# EAGLE board NEMOTIC HORSE (EAGLE 9.6.2)
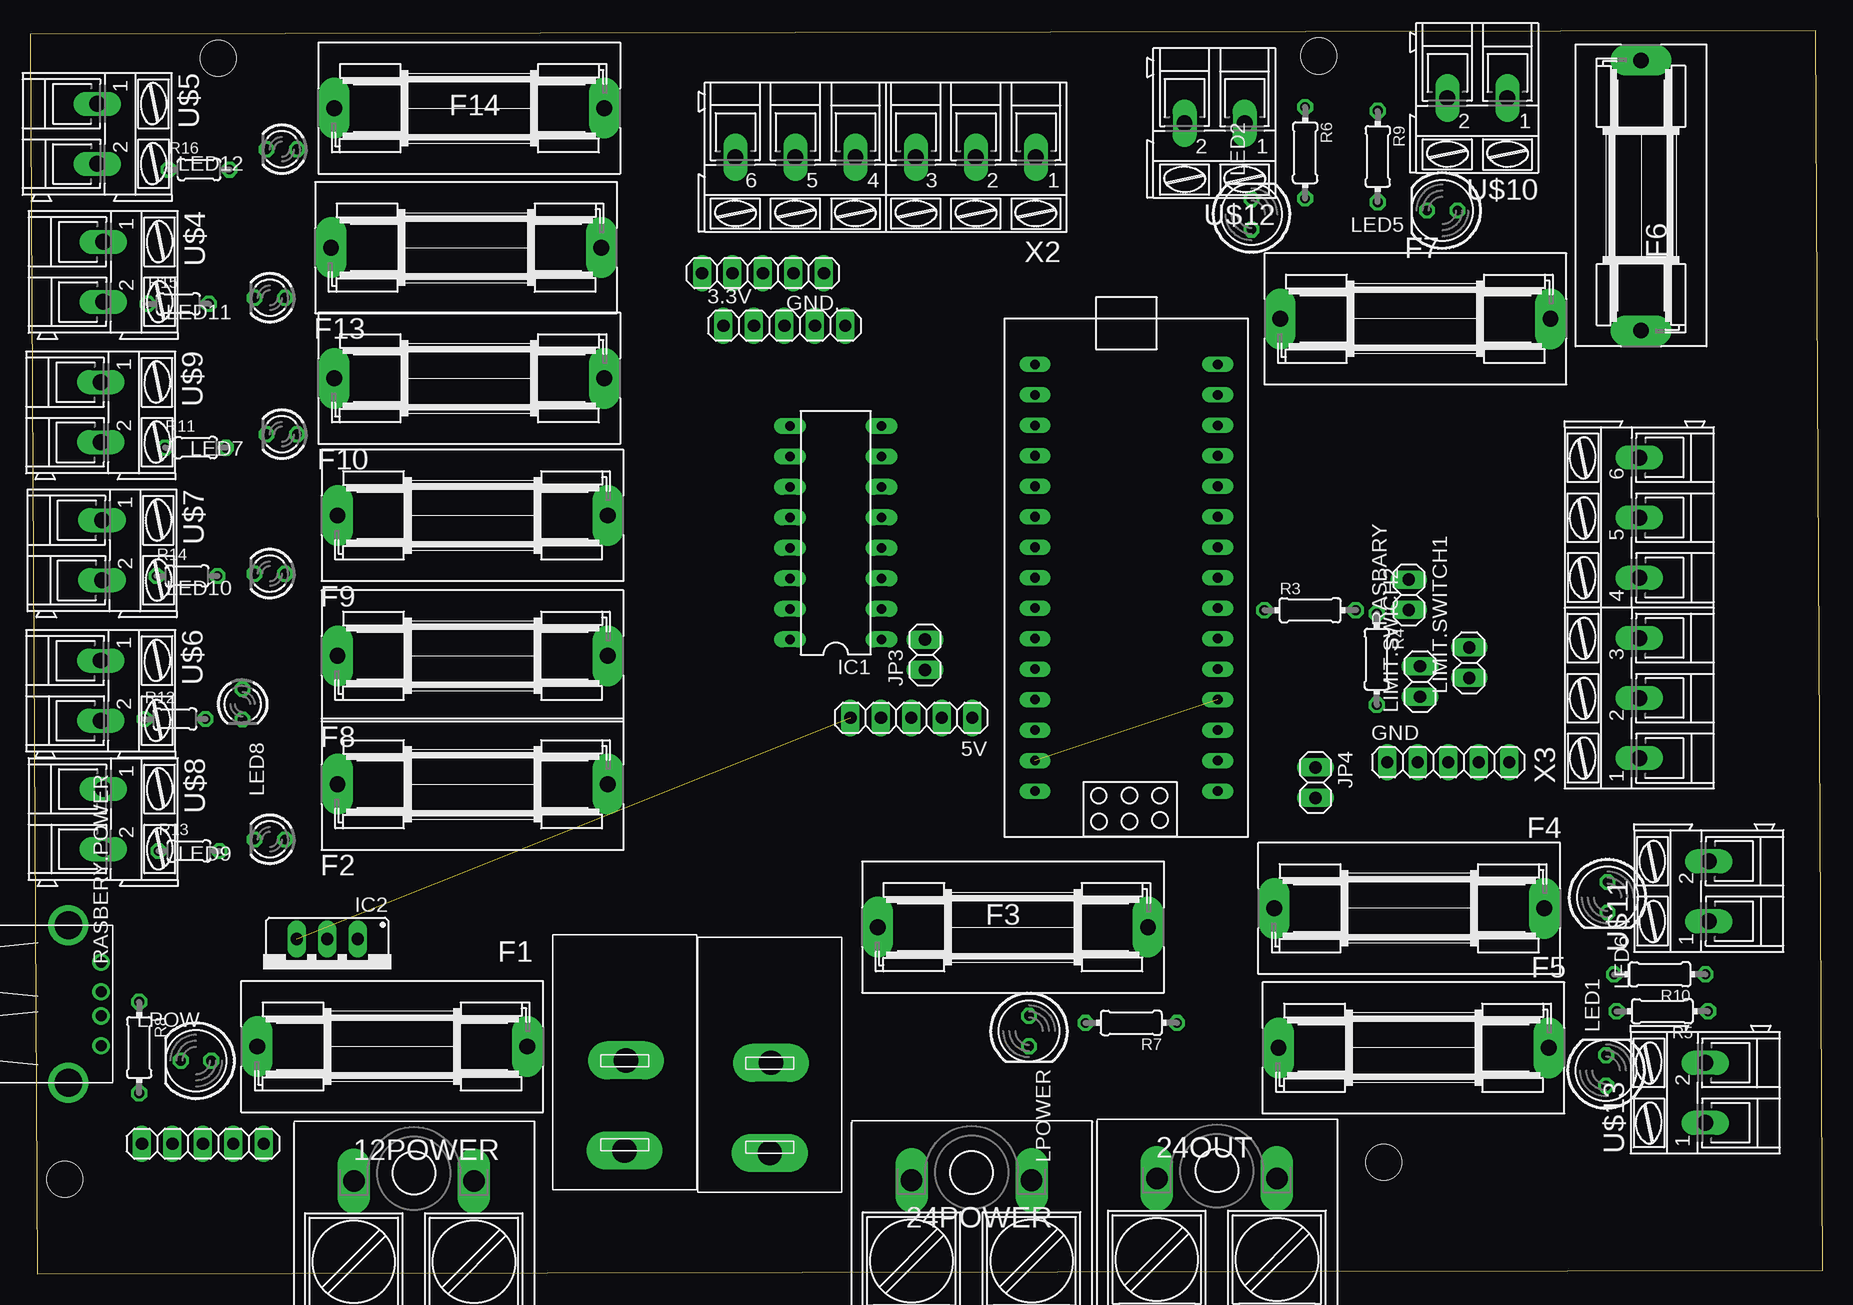
[diagram p0: board, top side]
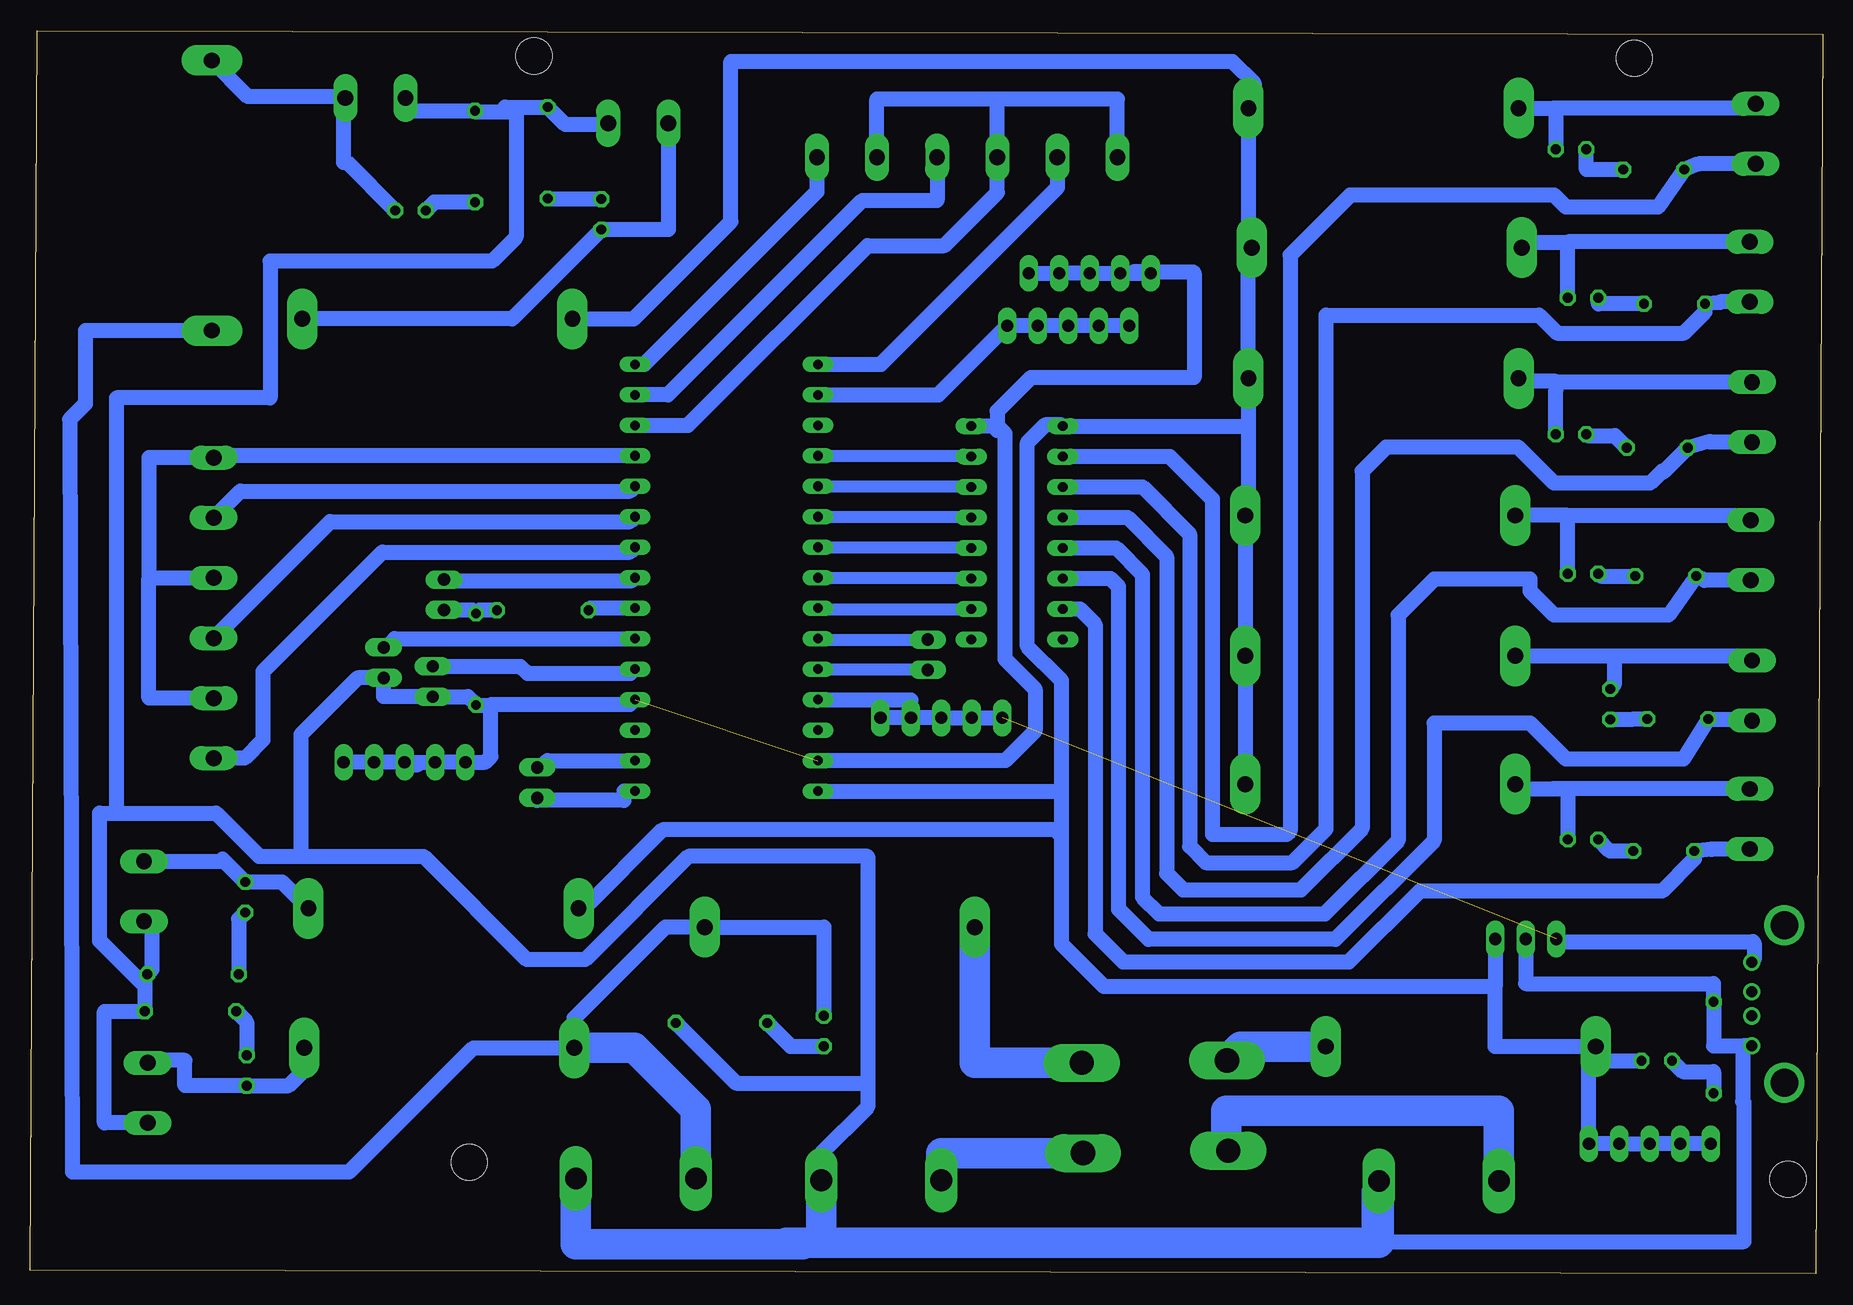
[diagram p1: board, bottom side, seen from below]

Size 149.4 x 103.6 mm. Coordinates in mm from the lower left corner, seen from the top.
Outline: 0.6,0 149.4,0.3 148.8,103.6 0,103.3 0.6,0
Copper layers (1*16): Top 0.035mm / dielectric 1.5mm / Bottom 0.035mm
Design rules "default *": minimum track width 0.6mm, minimum drill 0.35mm, track to track 0.6mm, track to pad 0.6mm, pad to pad 6mil, via to via 6mil, smd to smd 6mil, copper to edge 40mil, drill to drill 6mil, minimum pad ring 10mil, minimum via ring 8mil, stop-mask expansion 4mil, vias tented up to drill 0mil, thermal gap 10mil
Holes 3 mm at 15.7,101.3 2.9,7.9 107.4,101.5 112.8,9.3

## Footprints (pad centres in the part's own frame; a part is rotated, then mirrored left to right if it is on the bottom)
1X05 = drill 1.016 long: 1 -5.08,0; 2 -2.54,0; 3 0,0; 4 2.54,0; 5 5.08,0
W239-302 = drill 1.8 long: 1 -5,5; 2 5,5
SH22,5A = drill 1.321 pad 2.54 long: 1 -11.252,0; 2 11.252,0
DIL16 = drill 0.813 long: 1 -8.89,-3.81; 2 -6.35,-3.81; 3 -3.81,-3.81; 4 -1.27,-3.81; 5 1.27,-3.81; 6 3.81,-3.81; 7 6.35,-3.81; 8 8.89,-3.81; 9 8.89,3.81; 10 6.35,3.81; 11 3.81,3.81; 12 1.27,3.81; 13 -1.27,3.81; 14 -3.81,3.81; 15 -6.35,3.81; 16 -8.89,3.81
78XXS = drill 1.016 long: GND 0,-2.54; IN -2.54,-2.54; OUT 2.54,-2.54
1X02 = drill 1.016 long: 1 -1.27,0; 2 1.27,0
LED5MM = drill 0.813 octagon: A -1.27,0; K 1.27,0
LED3MM = drill 0.813 octagon: A -1.27,0; K 1.27,0
0204/7 = drill 0.813 octagon: 1 -3.81,0; 2 3.81,0
0204/5 = drill 0.813 octagon: 1 -2.54,0; 2 2.54,0
USB-A-H = drill 0.914: D+ 2.718,-1.003; D- 2.718,1.003; GND 2.718,-3.493; VBUS 2.718,3.493 | drill 2.311: P$5 0,-6.566; P$6 0,6.566
NANO = drill 0.8 long: 3.3V -10.16,24.13; 5V -10.16,-1.27; A0 -10.16,19.05; A1 -10.16,16.51; A2 -10.16,13.97; A3 -10.16,11.43; A4 -10.16,8.89; A5 -10.16,6.35; A6 -10.16,3.81; A7 -10.16,1.27; AREF -10.16,21.59; D2 5.08,1.27; D3 5.08,3.81; D4 5.08,6.35; D5 5.08,8.89; D6 5.08,11.43; D7 5.08,13.97; D8 5.08,16.51; D9 5.08,19.05; D10 5.08,21.59; D11 5.08,24.13; D12 5.08,26.67; D13 -10.16,26.67; GND -10.16,-6.35; GND1 5.08,-1.27; RAW -10.16,-8.89; RST -10.16,-3.81; RST1 5.08,-3.81; RX1 5.08,-6.35; TX0 5.08,-8.89
ON_OFF = drill 2.032 pad 3.175 long: P$1 3.27,5.952; P$2 10.795,5.842
AK300/2 = drill 1.321 long: 1 -2.515,0; 2 2.489,0
AK300/6 = drill 1.321 long: 1 -12.522,0; 2 -7.518,0; 3 -2.515,0; 4 2.515,0; 5 7.518,0; 6 12.522,0

## Placement (x,y rotation side)
3.3V  [1X05]  62.87,79.02 0 top
5V  [1X05]  73.45,46.34 180 top
12POWER  [W239-302]  31.99,2.74 0 top
12V  [1X05]  14.41,10.85 0 top
24OUT  [W239-302]  98.91,2.94 0 top
24POWER  [W239-302]  78.46,2.81 0 top
F1  [SH22,5A]  30.18,18.95 180 top
F2  [SH22,5A]  36.88,40.81 0 top
F3  [SH22,5A]  81.91,28.9 0 top
F4  [SH22,5A]  114.94,30.47 180 top
F5  [SH22,5A]  115.3,18.84 180 top
F6  [SH22,5A]  134.25,89.87 270 top
F7  [SH22,5A]  115.45,79.59 180 top
F8  [SH22,5A]  36.88,51.51 0 top
F9  [SH22,5A]  36.88,63.21 0 top
F10  [SH22,5A]  36.61,74.64 0 top
F13  [SH22,5A]  36.34,85.53 0 top
F14  [SH22,5A]  36.61,97.15 0 top
GND  [1X05]  118.19,42.65 0 top
GND.  [1X05]  61.08,83.4 180 top
IC1  ULN2003AN  [DIL16]  67.15,61.77 90 top
IC2  [78XXS]  24.76,25.38 180 top
JP3  [1X02]  74.59,51.6 90 top
JP4  [1X02]  107.13,40.94 270 top
LED1  LED5MM  [LED5MM]  131.34,16.96 90 top
LED2  LED5MM  [LED5MM]  101.79,88.3 90 top
LED5  LED5MM  [LED5MM]  117.69,88.62 180 top
LED6  LED5MM  [LED5MM]  131.46,31.39 270 top
LED7  LED3MM  [LED3MM]  20.98,69.97 180 top
LED8  LED3MM  [LED3MM]  17.71,47.48 270 top
LED9  LED3MM  [LED3MM]  19.98,36.21 180 top
LED10  LED3MM  [LED3MM]  19.98,58.35 180 top
LED11  LED3MM  [LED3MM]  19.98,81.34 180 top
LED12  LED3MM  [LED3MM]  20.98,93.72 180 top
LIMIT.SWICH2  [1X02]  115.84,49.37 90 top
LIMIT.SWITCH1  [1X02]  119.93,50.94 90 top
LPOW  LED5MM  [LED5MM]  13.84,17.77 180 top
LPOWER  LED5MM  [LED5MM]  83.25,20.24 270 top
R3  1k  [0204/7]  106.67,55.31 0 top
R4  2k  [0204/7]  112.23,51.23 270 top
R5  5k  [0204/7]  136.03,21.89 180 top
R6  2k  [0204/7]  106.26,93.43 270 top
R7  5k  [0204/7]  91.77,20.92 180 top
R8  2k  [0204/7]  9.1,18.87 270 top
R9  5k  [0204/7]  112.31,93.12 270 top
R10  2k  [0204/7]  135.82,24.97 180 top
R11  5k  [0204/5]  13.79,68.86 0 top
R12  2k  [0204/5]  12.09,46.24 0 top
R13  5k  [0204/5]  13.25,35.24 0 top
R14  2k  [0204/5]  13.09,58.16 0 top
R15  2k  [0204/5]  12.36,80.84 0 top
R16  2k  [0204/5]  14.09,92.03 0 top
RASBARY  [1X02]  114.9,56.6 90 top
RASBERY.POWER  USB-A-H  [USB-A-H]  3.2,22.5 0 top
U$1  ARDUINO_NANO  [NANO]  93.9,49.13 0 top
U$2  SWITCH_2  [ON_OFF]  67.6,6.8 90 top
U$3  SWITCH_2  [ON_OFF]  55.5,7 90 top
U$4  [AK300/2]  6.1,83.5 270 top
U$5  [AK300/2]  5.6,95 270 top
U$6  [AK300/2]  5.9,48.6 270 top
U$7  [AK300/2]  6,60.3 270 top
U$8  [AK300/2]  6.1,37.9 270 top
U$9  [AK300/2]  5.9,71.8 270 top
U$10  [AK300/2]  120.6,98 180 top
U$11  [AK300/2]  139.9,31.9 90 top
U$12  [AK300/2]  98.7,95.9 180 top
U$13  [AK300/2]  139.6,15.1 90 top
X2  [AK300/6]  71.3,93.06 180 top
X3  [AK300/6]  134.1,55.5 90 top

## Library data of the parts
3.3V 5V 12V F1-F10 F13 F14 GND GND. IC1 IC2 JP3 JP4 LED1 LED2 LED5-LED12 LIMIT.SWICH2 LIMIT.SWITCH1 LPOW LPOWER R3-R6 R8-R16 RASBARY RASBERY.POWER U$1-U$13 = MIA_LIBRARY-2-2-2
12POWER 24OUT 24POWER = MIA_LIBRARY-2-2-2; OC_FARNELL: unknown; OC_NEWARK: unknown
R7 = rcl; SPICEPREFIX: R
X2 X3 = MIA_LIBRARY-2-2-2; OC_FARNELL: unknown; OC_NEWARK: unknown; SPICEPREFIX: X

## Nets
3.3V: 3.3V.1 3.3V.2 3.3V.3 3.3V.4 3.3V.5 U$1.3.3V
5V: 5V.1 5V.2 5V.3 5V.4 5V.5 IC2.OUT RASBERY.POWER.VBUS U$1.5V
12.T1: IC1.1
12.T2: IC1.2 U$1.A5
12.T3: IC1.3 U$1.A4
12.T4: IC1.4 U$1.A3
12.T5: IC1.5 U$1.A2
12.T6: IC1.6 U$1.A1
12.T7: IC1.7 U$1.A0
12M1: F7.1 LED2.A U$12.2
12M2: F4.1 LED6.A U$11.2
12V: 12V.1 12V.2 12V.3 12V.4 12V.5 F1.2 F2.2 F4.2 F7.2 F8.2 F9.2 F10.2 F13.2 F14.2 IC1.9 IC2.IN LPOW.A U$1.RAW
24M1: F5.1 LED1.A U$13.2
24M2: F6.1 LED5.A U$10.1
24V: 24OUT.1 F3.2 F5.2 F6.2 LPOWER.A
DIR1: U$1.D7 X3.3
DIR2: U$1.D11 X2.3
EN1: U$1.D6 X3.1
EN2: U$1.D12 X2.1
GND: 12POWER.2 24OUT.2 24POWER.2 GND.1 GND.2 GND.3 GND.4 GND.5 GND..1 GND..2 GND..3 GND..4 GND..5 IC1.8 IC2.GND LIMIT.SWICH2.1 LIMIT.SWITCH1.1 R4.2 R5.1 R6.1 R7.1 R8.1 R9.1 R10.1 RASBERY.POWER.GND U$1.GND U$1.GND1 U$10.2 U$11.1 U$12.1 U$13.1
LS1: LIMIT.SWICH2.2 U$1.D2
LS2: LIMIT.SWITCH1.2 U$1.D3
N$1: 24POWER.1 U$2.P$1
N$2: LED1.K R5.2
N$4: F3.1 U$2.P$2
N$5: LED2.K R6.2
N$7: LED5.K R9.2
N$8: LED6.K R10.2
N$9: LED7.K R11.2
N$10: LPOWER.K R7.2
N$11: LPOW.K R8.2
N$12: LED8.K R12.2
N$13: U$1.RST1
N$14: JP4.1 U$1.RX1
N$15: JP4.2 U$1.TX0
N$16: LED9.K R13.2
N$18: U$1.AREF
N$19: LED10.K R14.2
N$20: LED11.K R15.2
N$21: LED12.K R16.2
N$23: JP3.1 U$1.A7
N$25: JP3.2 U$1.A6
N$28: U$1.RST
N$36: 12POWER.1 U$3.P$1
N$37: F1.1 U$3.P$2
PUL1: U$1.D8 X3.5
PUL2: U$1.D13 X2.5
RX.RAS: R3.2 R4.1 RASBARY.1
S1: IC1.16
S2: IC1.12 R11.1 U$9.2
S2L: F10.1 LED7.A U$9.1
S3: IC1.15 R13.1 U$8.2
S3L: F2.1 LED9.A U$8.1
S4: IC1.14 R12.1 U$6.2
S4L: F8.1 LED8.A U$6.1
S5: IC1.13 R14.1 U$7.2
S5L: F9.1 LED10.A U$7.1
S6: IC1.11 R15.1 U$4.2
S6L: F13.1 LED11.A U$4.1
S7: IC1.10 R16.1 U$5.2
S7L: F14.1 LED12.A U$5.1
STEPPER1: U$1.D9 X3.2 X3.4 X3.6
STEPPER2: U$1.D10 X2.2 X2.4 X2.6
TX.NANO.RAS: R3.1 U$1.D4
TX.RAS: RASBARY.2 U$1.D5

## Tracks (layer width: path | path; a pad name or v marks a point on that pad's centre or on a via)
3.3V
  Bottom 1.27: U$1.3.3V 73.71,73.26 3.3V.5 3.3V.4 3.3V.3 3.3V.2 3.3V.1
5V  (1 unrouted)
  Bottom 1.27: 5V.2 75.99,47.84 83.72,47.84 U$1.5V 83.8,47.8 | 5V.5 5V.4 5V.3 5V.2 | RASBERY.POWER.VBUS 5.72,26.19 5.72,27.59 5.83,27.7 22,27.7 IC2.OUT | 5V.2 5V.1
12.T2
  Bottom 1: IC1.2 70.96,55.38 83.64,55.38 U$1.A5
12.T3
  Bottom 1: IC1.3 70.96,57.99 70.93,58.02 U$1.A4
12.T4
  Bottom 1: IC1.4 70.96,60.53 70.93,60.56 U$1.A3
12.T5
  Bottom 1: U$1.A2 71.02,63.1 IC1.5
12.T6
  Bottom 1: U$1.A1 70.93,65.64 70.96,65.61 IC1.6
12.T7
  Bottom 1: IC1.7 71.02,68.18 U$1.A0
12M1
  Bottom 1.27: F7.1 109.23,79.59 LED2.A 96.21,87.03 U$12.2
12M2
  Bottom 1.27: F4.1 128.38,32.66 LED6.A 133.38,34.58 133.38,34.39 U$11.2
12V
  Bottom 1.27: F14.2 47.86,96.9 | 47.86,96.9 47.86,85.53 | 47.86,85.53 F13.2 | 47.86,85.53 F10.2 47.86,70.66 | 47.86,70.66 47.86,62.9 48.13,62.9 F9.2 F8.2 F2.2 | 47.86,70.66 IC1.9 63.43,70.75 64.8,70.75 66.28,69.27 66.28,52.28 63.46,49.46 63.46,40.24 | F7.2 99.1,79.59 91,87.69 91,101.05 49.2,101.05 47.4,99.25 47.4,97.36 47.86,96.9 | 27.3,23.95 59.9,23.95 63.46,27.51 63.46,36.5 | LPOW.A 18.93,17.77 F1.2 | IC2.IN 27.3,23.95 | F1.2 27.3,18.95 27.3,23.95 | 12V.1 12V.2 12V.3 12V.4 12V.5 19.49,18.95 F1.2 | F4.2 103.23,30.47 96.7,37 63.96,37 63.46,36.5 | 63.46,40.24 63.46,36.5 | U$1.RAW 63.46,40.24
24M1
  Bottom 1.27: F5.1 126.55,16.98 127.84,15.69 LED1.A 136.5,15.69 136.5,17.8 139.6,17.8 U$13.2
24M2
  Bottom 1.27: LED5.A 122.97,92.62 123.27,92.62 123.27,98.12 | F6.1 131.25,98.12 124.5,98.12 123.27,98.12 | U$10.1 123.12,98.12 123.27,98.12
24V
  Bottom 1.27: LPOWER.A 83.25,28.9 F3.2 96.46,28.9 104.05,21.31 F5.2 112.46,18.84 122.8,8.5 145.88,8.5 146.09,71.2 144.79,72.5 144.79,78.62 F6.2
  Bottom 2.54: 24OUT.1 93.91,13.71 99.04,18.84 F5.2
DIR1
  Bottom 1.27: U$1.D7 99.38,62.7 124.39,62.7 X3.3
DIR2
  Bottom 1.27: X2.3 73.82,89.46 80.04,89.46 96.24,73.26 U$1.D11
EN1
  Bottom 1.27: U$1.D6 99.38,60.16 120.04,60.16 130,50.2 130,44.5 131.52,42.98 X3.1
EN2
  Bottom 1.27: U$1.D12 98.2,75.8 83.82,90.18 X2.1
GND  (1 unrouted)
  Bottom 1.27: 111,47.4 112.21,47.4 R4.2 112.91,48.1 LIMIT.SWICH2.1 119.93,48.1 LIMIT.SWITCH1.1 122.1,49.67 126.8,44.97 126.8,34.8 | 109.8,96.84 112.22,96.84 R9.1 118.11,96.93 U$10.2 | 109.8,96.84 108.9,96.84 108.9,86.4 110.9,84.4 129.4,84.4 129.4,73 142.2,73 142.2,38.4 | IC1.8 69.16,70.66 68.8,70.3 68.8,70.7 | 68.8,70.7 68.8,71.9 66,74.7 52.4,74.7 52.4,83.4 52.5,83.5 56,83.5 | 68.8,70.7 68.15,70.05 68.15,51.25 65.64,48.74 65.64,45.26 68.12,42.78 U$1.GND | 139.84,24 139.84,24.76 R10.1 139.23,25.37 139.23,29.38 U$11.1 | 139.84,24 R5.1 | R5.1 139.87,21.86 | 57.5,83.4 GND..4 GND..3 GND..2 GND..1 | 57.5,83.4 56.3,83.4 | 111,47.4 111,43.1 111.45,42.65 GND.1 GND.2 | GND.3 117.99,42.45 117.05,42.45 | GND.2 115.85,42.45 | GND.3 GND.4 GND.5 | IC2.GND 24.76,24.2 9.1,24.2 R8.1 9.1,19.01 6.67,19.01 | 139.84,24 143.6,27.76 143.6,38.4 142.2,38.4 | 109.8,96.84 109.8,97.24 R6.1 104.79,95.77 101.22,95.77 U$12.1 | 126.8,34.8 130.3,34.8 133.9,38.4 142.2,38.4 | 126.8,34.8 116.6,34.8 108,26.2 103.14,26.2 94.54,34.8 79.6,34.8 79.6,15.9 | U$1.GND1 99.38,47.46 110.94,47.46 111,47.4 | 24POWER.2 83.5,7.85 83.5,10 79.6,13.9 79.6,15.9 | R7.1 90.56,15.9 79.6,15.9 | 12POWER.2 37.8,6.93 37.8,3.2 37.3,2.7 6.58,2.7 6.58,14.27 6.67,14.36 6.67,19.01 | RASBERY.POWER.GND 6.67,19.01 | GND.3 GND.2 | GND..5 56,83.5 | 56,83.5 57.5,83.5 57.5,83.4 | U$13.1 143.2,12.59 143.2,21.89 R5.1
  Bottom 2.54: 24OUT.2 103.91,2.49 97.5,2.48 86.4,2.46 | 86.4,2.46 85,2.46 | 12POWER.2 36.99,2.59 83.46,2.59 | 86.4,2.46 86.4,2.59 83.46,2.59 | 24POWER.2 83.46,2.59
LS1
  Bottom 1.27: LIMIT.SWICH2.2 108.54,50.64 107.94,50.04 99.34,50.04 U$1.D2
LS2
  Bottom 1.27: LIMIT.SWITCH1.2 119.74,52.21 119.01,52.94 U$1.D3
N$1
  Bottom 2.54: U$2.P$1 73.46,10.07 24POWER.1
N$2
  Bottom 1.27: R5.2 131.34,21.01 LED1.K
N$4
  Bottom 2.54: U$2.P$2 70.66,17.59 F3.1
N$5
  Bottom 1.27: LED2.K 106.21,89.57 R6.2
N$7
  Bottom 1.27: R9.2 115.73,89.31 LED5.K
N$8
  Bottom 1.27: LED6.K 132.01,29.57 R10.2
N$9
  Bottom 1.27: R11.2 17.33,69.86 19.6,69.86 LED7.K
N$10
  Bottom 1.27: R7.2 86.01,18.97 LPOWER.K
N$11
  Bottom 1.27: LPOW.K 11.67,16.87 9.1,16.87 R8.2
N$12
  Bottom 1.27: R12.2 15.93,46.21 LED8.K
N$14
  Bottom 1.27: JP4.1 106.85,42.21 106.28,42.78 U$1.RX1
N$15
  Bottom 1.27: U$1.TX0 99.91,40.24 99.91,39.46 107.13,39.46 JP4.2
N$16
  Bottom 1.27: R13.2 17.74,35.24 LED9.K
N$19
  Bottom 1.27: LED10.K 18.52,58.16 R14.2
N$20
  Bottom 1.27: R15.2 18.71,80.84 LED11.K
N$21
  Bottom 1.27: R16.2 19.71,92.03 LED12.K
N$23
  Bottom 1: U$1.A7 74.66,50.4 JP3.1
N$25
  Bottom 1: U$1.A6 83.67,52.87 JP3.2
N$36
  Bottom 2.54: 12POWER.1 26.99,13.6 49.7,13.6 49.7,10.27 U$3.P$1
N$37
  Bottom 2.54: U$3.P$2 48.5,18.95 F1.1
PUL1
  Bottom 1.27: X3.5 131.88,65.24 99.38,65.24 U$1.D8
PUL2
  Bottom 1.27: U$1.D13 78.5,75.8 63.78,90.52 X2.5
RX.RAS
  Bottom 1.27: R3.2 111.96,55.31 R4.1 112.53,55.34 RASBARY.1
S2
  Bottom 1.27: IC1.12 57.94,63.04 54.67,59.77 54.67,33.37 53.3,32 43.5,32 38.4,37.1 38.4,66.9 36.4,68.9 25.4,68.9 22.4,65.9 14.4,65.9 13.4,66.9 13.27,66.84 R11.1 9.41,69.37 9.41,69.31 U$9.2
S2L
  Bottom 1.27: F10.1 25.36,74.38 22.25,74.38 22.25,74.32 | LED7.A 22.25,73.7 22.25,74.32 | U$9.1 22.25,74.32
S3
  Bottom 1.27: IC1.15 61.92,55.42 60.64,54.14 60.64,28.34 58.3,26 39.5,26 33.6,31.9 13.4,31.9 10.71,34.59 R13.1 9.29,35.39 9.29,35.41 U$8.2
S3L
  Bottom 1.27: 22.6,40.39 20.89,40.39 21.25,40.04 LED9.A | 22.6,40.39 25.63,40.39 F2.1 | U$8.1 22.6,40.41 22.6,40.39
S4
  Bottom 1.27: IC1.14 59.38,57.96 58.69,57.28 58.69,30.39 56.18,27.88 40.62,27.88 32.4,36.1 32.4,45.9 24.4,45.9 21.4,42.9 11.62,42.9 R12.1 6.74,46.24 6.74,46.11 U$6.2
S4L
  Bottom 1.27: F8.1 17.4,51.51 | 17.4,51.51 6.6,51.51 6.6,51.12 U$6.1 | 17.4,51.51 17.4,49.06 LED8.A
S5
  Bottom 1.27: IC1.13 58.9,60.5 56.7,58.3 56.7,31.4 55.3,30 41.5,30 35.4,36.1 35.4,54.9 32.4,57.9 24.4,57.9 24.4,56.9 22.4,54.9 12.84,54.9 R14.1 9.86,57.8 9.86,57.81 U$7.2
S5L
  Bottom 1.27: 21.25,63.21 7.4,63.21 7.4,62.81 U$7.1 | LED10.A 21.25,63.21 | 21.25,63.21 F9.1
S6
  Bottom 1.27: IC1.11 56.68,65.58 52.76,61.66 52.76,35.62 51.42,34.29 44.2,34.29 41.4,37.09 41.4,79.9 23.64,79.9 22.13,78.39 11.57,78.39 9.82,80.14 R15.1 8.55,80.94 8.55,81.01 U$4.2
S6L
  Bottom 1.27: F13.1 25.09,85.95 21.4,85.95 21.4,85.9 21.25,85.9 | LED11.A 21.25,85.9 | U$4.1 21.25,86.02 21.25,85.9
S7
  Bottom 1.27: IC1.10 54.42,68.12 50.87,64.57 50.87,36.6 44.7,36.6 44.4,36.9 44.4,84.9 39.4,89.9 22.4,89.9 21.4,88.9 13.72,88.9 R16.1 10.37,92.51 U$5.2
S7L
  Bottom 1.27: F14.1 22.4,97.15 | 22.4,97.15 22.25,97 LED12.A | U$5.1 5.6,97.15 22.4,97.15
STEPPER1
  Bottom 1.27: U$1.D9 133.94,68.18 X3.6 139.5,68.02 139.5,58 | 139.5,58 X3.4 | X3.2 139.5,47.98 139.5,58
STEPPER2
  Bottom 1.27: X2.2 78.82,97.9 68.79,97.9 | X2.6 58.78,97.9 68.79,97.9 | 68.79,97.9 X2.4 68.79,90.12 73.2,85.7 79.6,85.7 94.58,70.72 U$1.D10
TX.NANO.RAS
  Bottom 1.27: U$1.D4 102.69,55.48 R3.1
TX.RAS
  Bottom 1.27: RASBARY.2 114.8,57.77 99.23,57.77 U$1.D5